# Altium PCB rpi_adapter.PcbDoc (part 2 of 3)
Units mil, origin at the board's own origin, x right, y up, seen from the top; angles counter-clockwise.
Board outline 1339.12 x 1250 mil, 4 copper layers (Top Layer, L02_GND, L03_GND, Bottom Layer), stack 36.268 mil thick; 18 components, 28 nets, 121 pads, 201 vias.
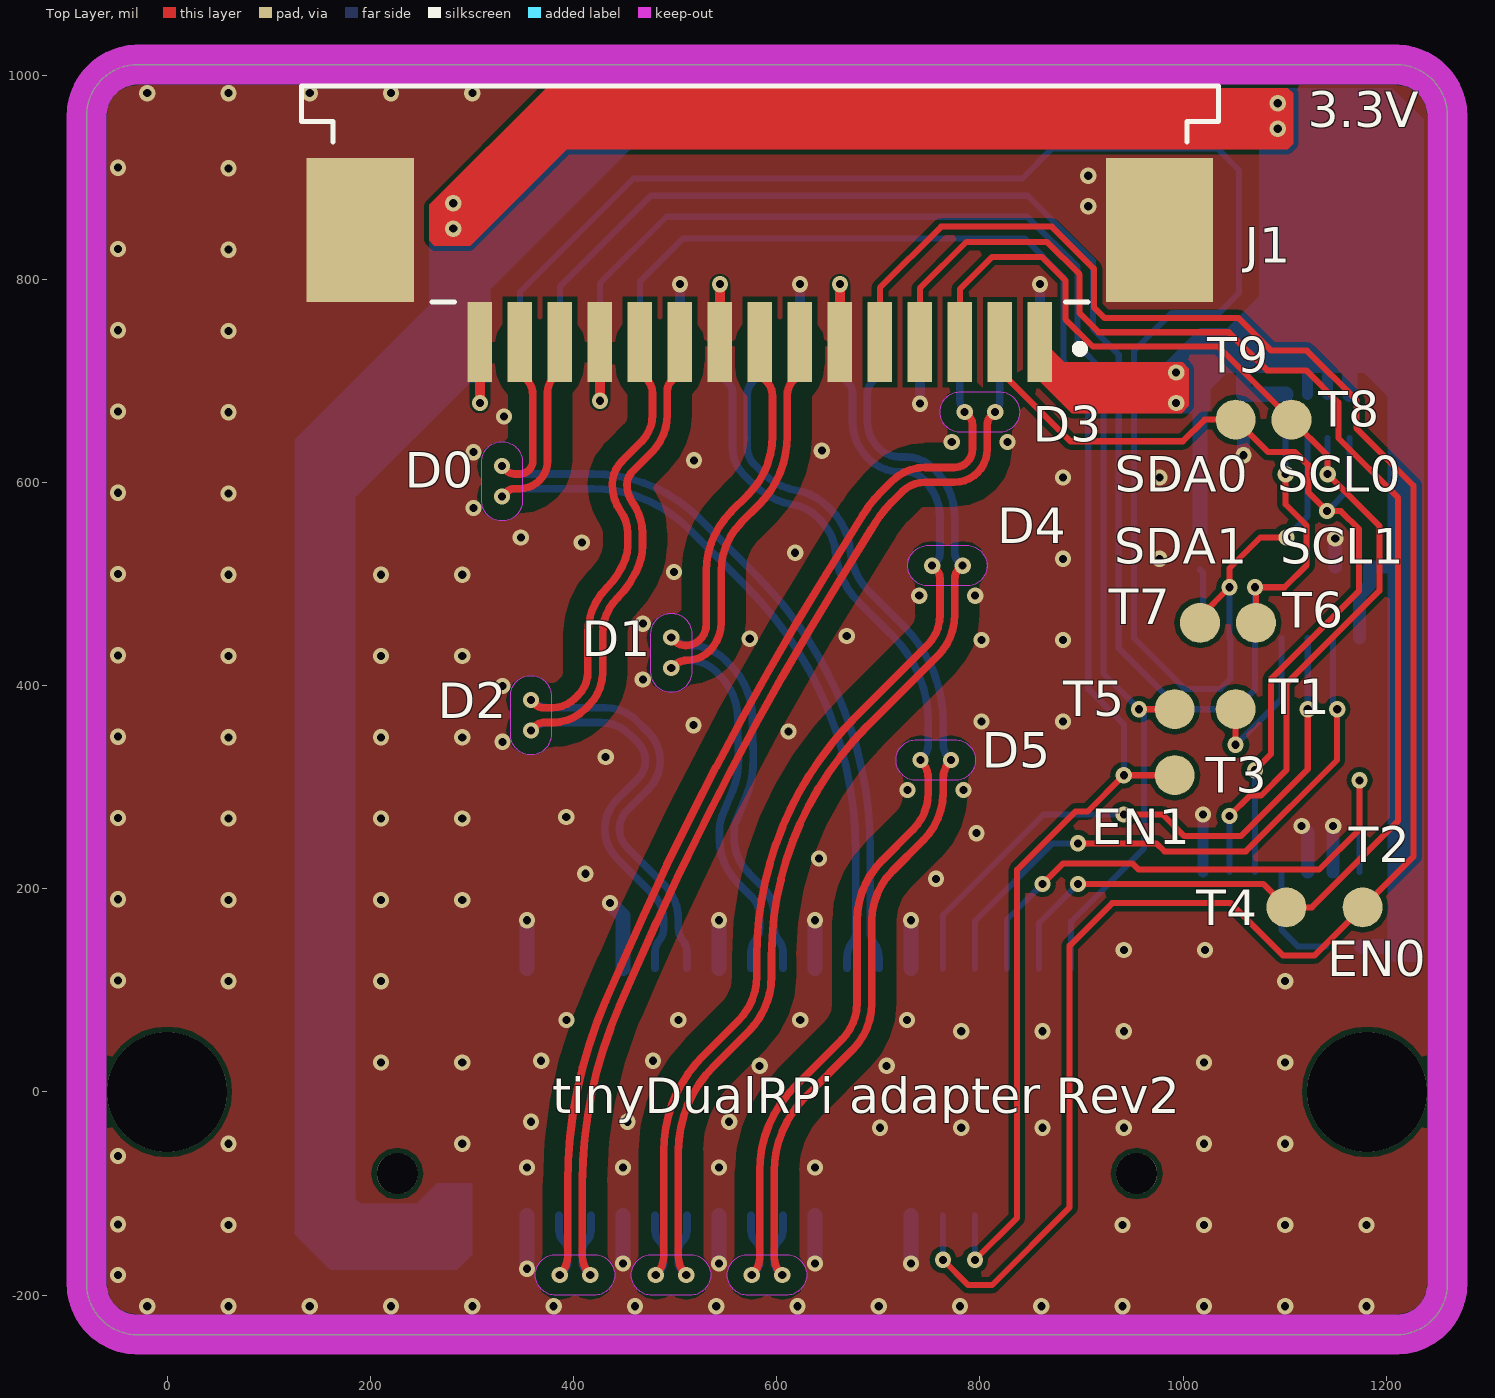
[diagram p0: Top Layer view]

## Keep-outs (continued)
L02_GND: (continued)
  region: 349.77,619.99 349.77,581.94 349.69,580.19 349.46,578.47 349.08,576.76 348.56,575.1 347.89,573.49 347.09,571.94 346.15,570.48 345.09,569.08 343.91,567.81 342.62,566.63 341.24,565.56 339.77,564.63 338.22,563.82 336.61,563.15 334.94,562.63 333.24,562.24 331.51,562.01 329.77,561.94 328.02,562.01 326.29,562.24 324.59,562.63 322.93,563.15 321.31,563.82 319.77,564.63 318.29,565.56 316.91,566.63 315.62,567.81 314.45,569.08 313.38,570.48 312.45,571.94 311.64,573.49 310.97,575.1 310.45,576.76 310.07,578.47 309.84,580.19 309.77,581.94 309.77,619.99 309.84,621.74 310.07,623.47 310.45,625.17 310.97,626.83 311.64,628.44 312.45,629.99 313.38,631.47 314.45,632.84 315.62,634.14 316.91,635.32 318.29,636.38 319.77,637.32 321.31,638.13 322.93,638.79 324.59,639.32 326.29,639.69 328.02,639.91 329.77,639.99 331.51,639.91 333.24,639.69 334.94,639.32 336.61,638.79 338.22,638.13 339.77,637.32 341.24,636.38 342.62,635.32 343.91,634.14 345.09,632.84 346.15,631.47 347.09,629.99 347.89,628.44 348.56,626.83 349.08,625.17 349.46,623.47 349.69,621.74
  region: 570.55,697.65 596.57,697.65 596.57,778.39 570.55,778.39
  region: 373.7,697.65 399.72,697.65 399.72,778.39 373.7,778.39
  region: 334.33,697.65 360.35,697.65 360.35,778.39 334.33,778.39
  region: 737.59,346.6 775.63,346.6 777.38,346.52 779.11,346.29 780.81,345.91 782.47,345.39 784.1,344.72 785.63,343.92 787.11,342.98 788.5,341.92 789.78,340.74 790.95,339.45 792.03,338.07 792.95,336.6 793.77,335.05 794.44,333.44 794.95,331.77 795.34,330.07 795.56,328.34 795.63,326.6 795.56,324.85 795.34,323.12 794.95,321.42 794.44,319.76 793.77,318.14 792.95,316.6 792.03,315.12 790.95,313.74 789.78,312.45 788.5,311.28 787.11,310.21 785.63,309.28 784.1,308.47 782.47,307.8 780.81,307.28 779.11,306.9 777.38,306.67 775.63,306.6 737.59,306.6 735.85,306.67 734.11,306.9 732.41,307.28 730.75,307.8 729.13,308.47 727.59,309.28 726.11,310.21 724.73,311.28 723.45,312.45 722.27,313.74 721.2,315.12 720.27,316.6 719.45,318.14 718.79,319.76 718.27,321.42 717.88,323.12 717.67,324.85 717.59,326.6 717.67,328.34 717.88,330.07 718.27,331.77 718.79,333.44 719.45,335.05 720.27,336.6 721.2,338.07 722.27,339.45 723.45,340.74 724.73,341.92 726.11,342.98 727.59,343.92 729.13,344.72 730.75,345.39 732.41,345.91 734.11,346.29 735.85,346.52